# Altium PCB GAT562 Mesh Solar Relay V1.3.PcbDoc
Units mm, origin at the board's own origin, x right, y up, seen from the top; angles counter-clockwise.
Board outline 48.02 x 27 mm, 2 copper layers (Top Layer, Bottom Layer), stack 0.863 mm thick; 41 components, 26 nets, 133 pads, 47 vias.
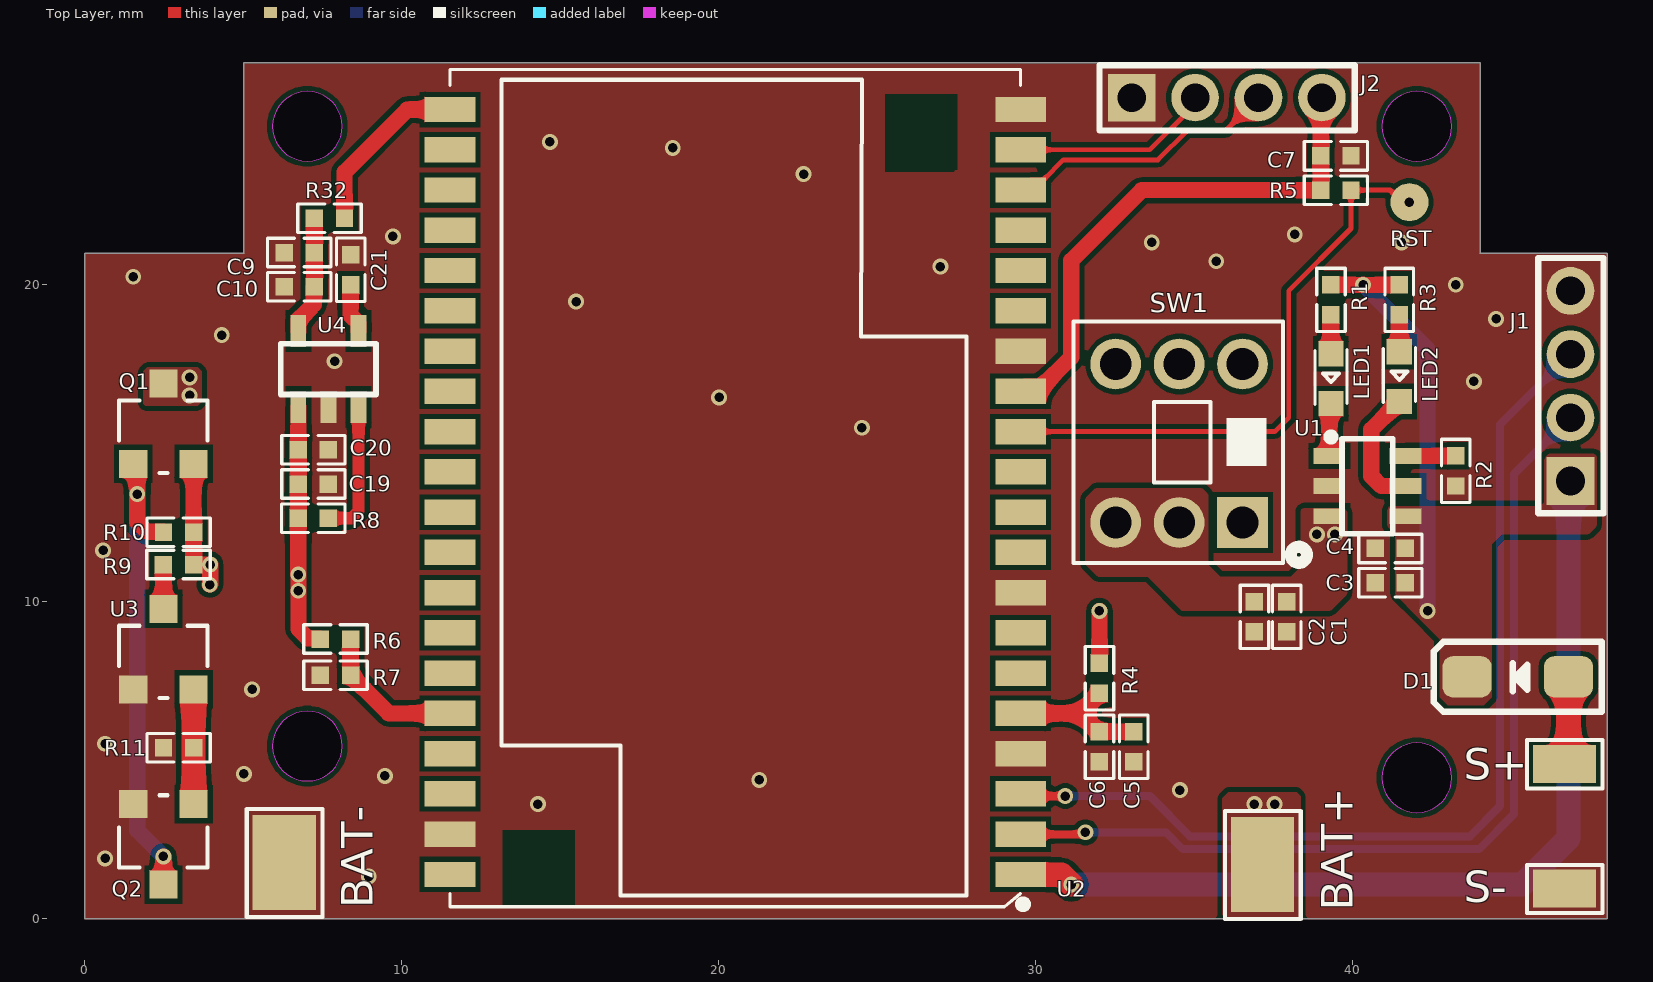
[diagram p0: Top Layer view]
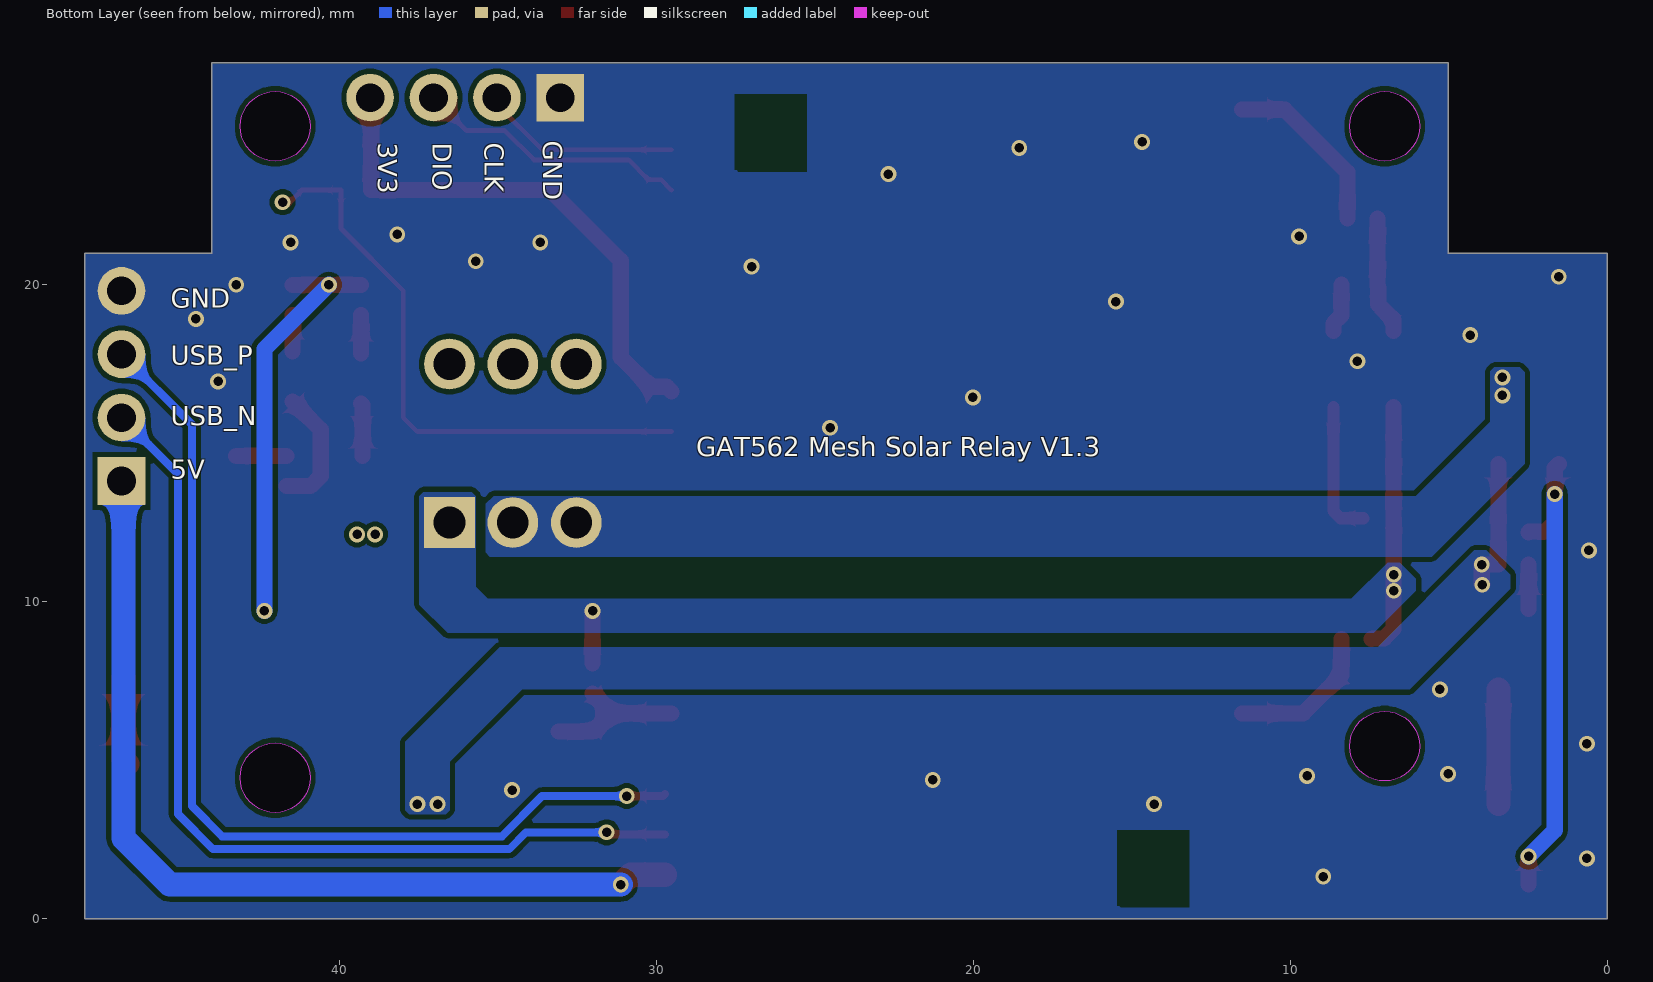
[diagram p1: Bottom Layer view, seen from below]
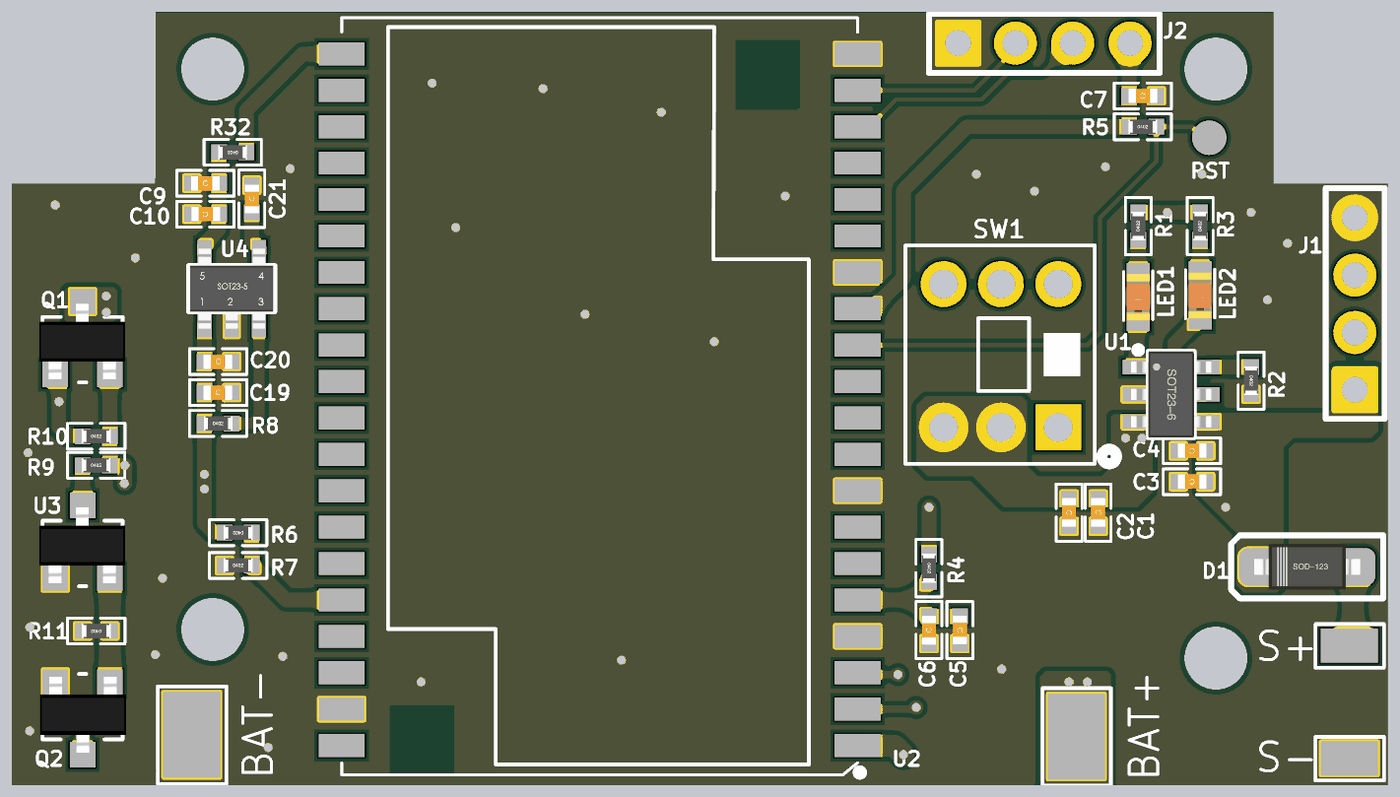
[diagram p2: 3D render of the assembled board from above, using the file's embedded part models]

## Layer stack, top to bottom
Top Solder: solder mask 0.0102, Solder Resist, Dk 3.5
Top Layer: signal copper 0.0175
Dielectric 3: prepreg 0.1679, PP-006, Dk 4.1
Dielectric 1: dielectric 0.4925, FR-4, Dk 4.8
Dielectric 2: prepreg 0.1679, PP-006, Dk 4.1
Bottom Layer: signal copper 0.0175
Bottom Solder: solder mask 0.0102, Solder Resist, Dk 3.5

## Board outline
0,0 0,21 5.016,21 5.016,27 44.017,27 44.017,21 48.017,21 48.017,0
cut-out: 40.916,4.45 ccw(c42.016,4.45) 42.016,3.35 ccw(c42.016,4.45) 43.116,4.45 ccw(c42.016,4.45) 42.016,5.55 ccw(c42.016,4.45)
cut-out: 5.917,5.45 ccw(c7.017,5.45) 7.017,4.35 ccw(c7.017,5.45) 8.117,5.45 ccw(c7.017,5.45) 7.017,6.55 ccw(c7.017,5.45)
cut-out: 40.916,25 ccw(c42.016,25) 42.016,23.9 ccw(c42.016,25) 43.116,25 ccw(c42.016,25) 42.016,26.1 ccw(c42.016,25)
cut-out: 5.917,25 ccw(c7.017,25) 7.017,23.9 ccw(c7.017,25) 8.117,25 ccw(c7.017,25) 7.017,26.1 ccw(c7.017,25)

## Design rules (kind name [scope] priority, off if disabled: settings)
Clearance [All] p1: gap=0.152 ignorepadtopadclearanceinfootprint=FALSE
ComponentClearance [All] p1: gap=0.051 collisioncheckmode=3 verticalgap=0.254 showdistances=FALSE
DiffPairsRouting JLC_4LOR6L_2313_DiffPair_100OM [InDifferentialPairClass('JLC_4LOR6L_2313_100OM')] p1 off: maxlimit=0.203 minlimit=0.203 mostfreqgap=0.203 toplayer_minwidth=0.381 toplayer_maxwidth=0.381 toplayer_prefwidth=0.381 bottomlayer_minwidth=0.381 bottomlayer_maxwidth=0.381 bottomlayer_prefwidth=0.381 maxuncoupledlength=12.7
DiffPairsRouting JLC_4LOR6L_2313_DiffPair_90OM [InDifferentialPairClass('JLC_4LOR6L_2313_90OM')] p2: maxlimit=0.203 minlimit=0.203 mostfreqgap=0.203 toplayer_minwidth=0.153 toplayer_maxwidth=0.153 toplayer_prefwidth=0.153 bottomlayer_minwidth=0.153 bottomlayer_maxwidth=0.153 bottomlayer_prefwidth=0.153 maxuncoupledlength=12.7
DiffPairsRouting [All] p3 off: maxlimit=0.254 minlimit=0.254 mostfreqgap=0.254 toplayer_minwidth=0.381 toplayer_maxwidth=0.381 toplayer_prefwidth=0.381 bottomlayer_minwidth=0.381 bottomlayer_maxwidth=0.381 bottomlayer_prefwidth=0.381 maxuncoupledlength=12.7
MatchedLengths ALL [All] p1: tolerance=0.127 checknetsindiffpair=TRUE checkdiffpairvsdiffpair=FALSE checkxsignals=FALSE checkothers=FALSE
PlaneClearance [All] p1: clearance=0.203
PlaneConnect [All] p1: planeconnectstyle=Direct reliefexpansion=0.508 reliefentries=4 reliefconductorwidth=0.254 reliefairgap=0.254
PolygonConnect PWR_20mil [InNetClass('PWR')] p1: connectstyle=Direct reliefconductorwidth=0.508 reliefentries=4 polygonreliefangle="90 Angle" airgapwidth=0.254
PolygonConnect DIP_RELIEF--10MIL [(InComponentClass('Top Side Components')) and  (OnLayer('Multi-Layer'))] p2: connectstyle=Direct reliefconductorwidth=0.254 reliefentries=4 polygonreliefangle="90 Angle" airgapwidth=0.254
PolygonConnect ALL_FULL [All] p3: connectstyle=Direct reliefconductorwidth=0.254 reliefentries=4 polygonreliefangle="90 Angle" airgapwidth=0.254
RoutingVias VIA12MIL [All] p1: holewidth=0.305 width=0.61 viastyle="Through Hole" minholewidth=0.2 minwidth=0.4 maxholewidth=0.305 maxwidth=0.61
RoutingVias VIA7.874 [All] p2 off: holewidth=0.2 width=0.4 viastyle="Through Hole" minholewidth=0.2 minwidth=0.4 maxholewidth=0.2 maxwidth=0.4
RoutingVias VIA8MIL [All] p3 off: holewidth=0.203 width=0.406 viastyle="Through Hole" minholewidth=0.203 minwidth=0.406 maxholewidth=0.203 maxwidth=0.406
RoutingVias VIA10MIL [All] p4 off: holewidth=0.254 width=0.508 viastyle="Through Hole" minholewidth=0.254 minwidth=0.508 maxholewidth=0.254 maxwidth=0.508
SilkToSilkClearance [All vs OnLayer('Keep-Out Layer')] p1: silktosilkclearance=2.032
SilkToSolderMaskClearance SilkscreenOverComponentPads [IsPad] p1: minsilkscreentomaskgap=0.003 clearancetoexposedcopper=TRUE
SolderMaskExpansion [All] p1: expansion=0.064 istentingtop=FALSE
UnRoutedNet [All] p1: checkbadconnections=TRUE
Width [All] p1: maxlimit=0.762 minlimit=0.152 preferedwidth=0.152
Width PWR--10mil [InNetClass('PWR')] p2 off: maxlimit=2.54 minlimit=0.152 preferedwidth=0.508
Width ANT-20mil [InNetClass('ANT')] p3 off: maxlimit=0.508 minlimit=0.508 preferedwidth=0.508
Width Width-6mil [All] p4 off: maxlimit=0.203 minlimit=0.102 preferedwidth=0.152
Width JLC_4LOR6L_2313_DiffPair_100OM_width [InDifferentialPairClass('JLC_4LOR6L_2313_100OM')] p5 off: maxlimit=0.122 minlimit=0.122 preferedwidth=0.122
Width JLC_4LOR6L_2313_DiffPair_90OM_width [InDifferentialPairClass('JLC_4LOR6L_2313_90OM')] p6 off: maxlimit=0.153 minlimit=0.153 preferedwidth=0.153
Width JLC_4LOR6L_2313_DiffPair_50OM_width [InNetClass('JLC_4LOR6L_2313_50OM')] p7 off: maxlimit=0.147 minlimit=0.147 preferedwidth=0.147
23 further rules are at their usual default settings.

## Components (designator, comment, footprint, x,y, rotation, side; value= is the part's Value field where it differs from the comment)
BAT+ "" PAD2*3 31.317,2.005 r180 top locked
BAT- "" PAD2*3 0.456,2.068 r180 top
C1 "0.1UF" C0402 37.91,9.525 r270 top
C2 "2.2uF" C0402 36.893,9.525 r270 top
C3 "4.7uF" C0402 41.181,10.604 r180 top
C4 "0.1UF" C0402 41.181,11.684 r180 top
C5 "4.7uF" C0402 33.084,5.43 r270 top
C6 "0.1uF/0402" C0402 32.004,5.43 r90 top
C7 "0.1uF/0402" C0402 39.464,24.066 r180 top
C9 "0.1UF" C0402 6.764,21.019 r0 top
C10 "2.2uF" C0402 6.764,19.939 r180 top
C19 "4.7uF" C0402 7.206,13.716 r0 top
C20 "0.1UF" C0402 7.206,14.796 r0 top
C21 "0.1UF" C0402 8.382,20.478 r90 top
D1 "SS24-SOD123" SOD-123-1 45.2,7.636 r0 top
J1 "H-D-1X02" HDR1X4-2.0 46.863,13.812 r90 top
J2 "H-D-1X02" HDR1X4-2.0 33.02,25.908 r0 top
LED1 "RED" LED0603_RED_3D 39.306,17.831 r270 top
LED2 "GREEN" LED0603_RED_3D 41.465,17.894 r270 top
Q1 "IRLML5203TR" SOT23 1.524,14.351 r0 top
Q2 "2N7002" SOT23 3.429,3.619 r180 top
R1 "10K" R0402 39.306,19.525 r90 top
R2 "480 Ohm" R0402 43.244,14.13 r270 top
R3 "10K" R0402 41.465,19.525 r90 top
R4 "0R" R0402 32.004,7.587 r270 top
R5 "10K" R0402 39.464,22.987 r0 top
R6 "1M/0402" R0402 7.905,8.826 r180 top
R7 "1.5M/0402" R0402 7.905,7.683 r0 top
R8 "10K" R0402 7.204,12.637 r0 top
R9 "0R/0402" R0402 2.952,11.176 r0 top
R10 "1M/0402" R0402 2.954,12.192 r0 top
R11 "1M/0402" R0402 2.954,5.397 r180 top
R32 "0R" R0402 7.714,22.098 r180 top
RST "" PAD_29MIL 42.073,28.436 r90 top
S+ "" PAD1*2 46.963,10.72 r90 top
S- "" PAD1*2 46.963,6.783 r90 top
SW1 "SW TH 7*7" "SW TH 7*7" 36.517,12.5 r270 top locked
U1 "XQH4057D" XQH4057D 40.456,13.65 r90 top
U2 "GAT562 Mesh Module" "GAT562 MODULE" 29.516,1.4 r180 top locked
U3 "MAX809T" SOT23 1.524,7.239 r0 top
U4 "MIC5219-3.3V" SOT23-5 6.731,16.142 r180 top

## Footprints (in the part's own frame and the unit in brackets; to place one, negate y for a bottom-side part, rotate by r counter-clockwise, add the part's x,y. Pads: shape width x height; smd on the part's side, far side on the other; paste and mask are expansions set on the pad)
C0402 [mm]
  rect 0.55x0.55 smd: 1(-0.475,0) 2(0.475,0)
  silkscreen extent -1,-0.45 1,0.45, body extent -0.51,-0.25 0.49,0.25, height 0.49
"GAT562 MODULE" [mm]
  rect 1.6x0.8 smd: 1(0,0) 2(0,-1.27) 3(0,-2.54) 4(0,-3.81) 5(0,-5.08) 6(0,-6.35) 7(0,-7.62) 8(0,-8.89) 9(0,-10.16) 10(0,-11.43) 11(0,-12.7) 12(0,-13.97) 13(0,-15.24) 14(0,-16.51) 15(0,-17.78) 16(0,-19.05) 17(0,-20.32) 18(0,-21.59) 19(0,-22.86) 20(0,-24.13) 21(18,-24.13) 22(18,-22.86) 23(18,-21.59) 24(18,-20.32) 25(18,-19.05) 26(18,-17.78) 27(18,-16.51) 28(18,-15.24) 29(18,-13.97) 30(18,-12.7) 31(18,-11.43) 32(18,-10.16) 33(18,-8.89) 34(18,-7.62) 35(18,-6.35) 36(18,-5.08) 37(18,-3.81) 38(18,-2.54) 39(18,-1.27) 40(18,0)
  Multi-Layer pour cut-out: 2.007,-22.225 2.007,-24.613 4.267,-24.613 4.267,-22.174 2.108,-22.174 2.057,-22.225
  Multi-Layer pour cut-out: 14.072,0.991 14.072,-1.397 16.332,-1.397 16.332,1.041 14.173,1.041 14.122,0.991
  silkscreen extent -0.18,-25.39 18,1.04
HDR1X4-2.0 [mm] "Connector; Header; 4 Position"
  rect 1.5x1.5 hole 0.9: 1(0,0)
  round 1.5 hole 0.9: 2(2,0) 3(4,0) 4(6,0)
  silkscreen extent -1.02,-1.04 7.04,1.02
LED0603_RED_3D [mm]
  rect 0.8x0.8 smd: 1(0,0) 2(1.575,0)
  silkscreen extent -0.13,-0.51 1.6,0.51, body extent -0.02,-0.4 1.6,0.4, height 1.1
PAD1*2 [mm]
  rect 1.2x2 smd: 1(-5.83,0.29)
  silkscreen extent -6.6,-0.91 -5.08,1.47
PAD2*3 [mm]
  rect 2x3 smd: 1(-5.83,0.29)
  silkscreen extent -7.04,-1.4 -4.65,2.01
PAD_29MIL [mm]
  round 1.2 smd: 1(-5.83,0.29)
R0402 [mm]
  rect 0.55x0.55 smd: 1(-0.475,0) 2(0.475,0)
  silkscreen extent -1,-0.45 1,0.45, body extent -0.5,-0.25 0.5,0.25, height 0.3
SOD-123-1 [mm]
  rrect50% 1.55x1.3 smd: 1(1.6,0) 2(-1.6,0)
  silkscreen extent -2.65,-1.1 2.65,1.1, body extent -1.85,-0.8 1.85,0.8, height 1.22
SOT23 [mil]
  rect 35x35 smd: 1(0,0) 2(75,0) 3(37.5,100)
  silkscreen extent -18,-11 93,79, body extent -22,-7 96,97, height 43
SOT23-5 [mm]
  rect 0.5x1 smd: 1(0,0) 2(-0.95,0) 3(-1.9,0) 4(-1.9,-2.4) 5(0,-2.4)
  silkscreen extent -2.45,-2 0.55,-0.4, body extent -2.4,-2.6 0.5,0.2, height 1.09
"SW TH 7*7" [mm]
  rect 1.6x1.6 hole 1: 1(0,0)
  round 1.6 hole 1: 2(0,-2) 3(0,-4) 4(-5,0) 5(-5,-2) 6(-5,-4)
  silkscreen extent -6.35,-5.33 1.27,2.03
XQH4057D [mm]
  rect 0.5x1 smd: 1(0.95,1.2) 2(0,1.2) 3(-0.95,1.2) 4(-0.95,-1.2) 5(0,-1.2) 6(0.95,-1.2)
  silkscreen extent -1.5,-0.8 1.66,1.26, body extent -1.5,-1.4 1.5,1.4, height 1.15

## Part data
BAT+ BAT- RST S+ S-: library part TEST-DOT
C1 C4 C5 C9 C10 C19 C20 C21: library part 0_1.1UF
C2 C3: library part 0.1UF
C6 C7: library part CAP, "Capacitor"
D1: library part "DIODE SCHOTTKY_0", "DIODE 1N5817,DIP, 20V, 1A", Package=SMA, Vendor="DIODES Incorporated.", Vendor PN=SBR3A40SA
J1 J2: library part CON6_1_Dup1
LED1 LED2: library part LED
Q1: library part PMOS-2, "P-Channel Power MOSFET", ComponentLink1Description="Manufacturer Link", ComponentLink1URL=http://www.irf.com/, DatasheetVersion=PD-9.390D, LatestRevisionDate=17-Jul-2002, LatestRevisionNote="Re-released for DXP Platform.", Note="Pin 4 not drawn and electrically connected to Pin 2.", PackageDescription="TO, Thru-Hole, Vertical, Heatsink Mounted; 3 In-Line Leads; Pitch 2.54 mm", PackageReference=TO-220AB, PackageVersion=Feb-1997, Published=8-Jun-2000, Publisher="Altium Limited"
Q2: library part MOSFET-N
R1 R2 R3 R5 R6 R7 R8 R9 R10 R11: library part R0402_1.06K_WALSIN, NO_STUFF=., VENDER\PN=WALSIN\WR04X8061FT
R4 R32: library part RES, "Resistor , 2K Ohm 0402  5%"
SW1: "SW TH 7*7 3P/6P"
U2: library part INTERFACE
U3: "MAX809T SOT23"
U4: library part "REG CAT7101_2"

## Via types
v1: diameter 0.5, hole 0.3, Top Layer to Bottom Layer, tented both sides, 47 vias

## Nets (pads, with @x,y where several pads share a name; then routed paths per layer and width w, separated by ;. In a path a pad name is that pad's centre, name@x,y a point inside that pad or via, vN(x,y) a via of type N, cw(c..) or ccw(c..) an arc to the next point about the centre after c; other vN are vias at no path point)
3V3_SX: C9.2 C10.1 R32.2 U4.5 | length 3.8
  Top Layer w0.508: U4.5 6.731,18.894 7.218,19.381 7.218,19.918 C10.1 C9.2 R32.2
5V+: D1.1 S+.1 | length 2.8
  Top Layer w0.762: S+.1 46.799,5.016 D1.1
ADC_VBAT: R6.1 R7.2 U2.36 | length 4.8
  Top Layer w0.508: R6.1 R7.2 9.583,6.48 U2.36
BAT+: BAT+.1 Q1.2 R9.2 R10.2 | length 4.3
  Top Layer w0.508: Q1.2 3.429,13.208 R10.2 3.429,11.178 R9.2 v1(3.952,11.176) 3.952,10.556 v1(3.937,10.541)
  other v1: 36.893,3.619 37.529,3.619
BAT_EN: Q2.1 R11.1 U3.2 | length 3.6
  Top Layer w0.762: Q2.1 R11.1 U3.2
BAT_NRF: C5.1 C6.2 R4.2 U2.5 | length 4.7
  Top Layer w0.508: U2.5 31.372,6.48 ; R4.2 31.372,6.48 ; C5.1 C6.2 31.983,5.927 31.926,5.927 31.372,6.48
GND: BAT-.1 C1.2 C2.2 C3.2 C4.2 C5.2 C6.1 C7.1 C9.1 C10.2 C19.2 C20.2 C21.2 J1.4 J2.1 Q2.2 R2.2 R7.1 R11.2 S-.1 U1.2 U2.4 U2.8 U2.14 U2.20 U2.39 U3.1 U4.2
  other v1: 8.954,1.333 0.635,1.905 14.287,3.619 34.544,4.064 21.273,4.381 9.461,4.508 5.016,4.572 0.635,5.524 5.271,7.239 0.572,11.62 24.511,15.494 20.002,16.447 43.815,16.954 7.874,17.59 4.318,18.415 44.514,18.923 15.494,19.473 43.243,20.002 1.524,20.256 26.987,20.574 35.687,20.743 33.655,21.336 41.529,21.336 9.716,21.526 38.163,21.59 22.669,23.495 18.542,24.32 14.668,24.511
NetC21_1: C21.1 U4.4 | length 1.6
  Top Layer w0.508: C21.1 8.382,19.033 8.631,18.784 U4.4
NetLED1_1: LED1.1 R1.1 | length 1.2
  Top Layer w0.508: LED1.1 R1.1
NetLED1_2: LED1.2 U1.1 | length 1.7
  Top Layer w0.508: U1.1 39.256,16.206 LED1.2
NetLED2_1: LED2.1 R3.1 | length 1.2
  Top Layer w0.508: LED2.1 R3.1
NetLED2_2: LED2.2 U1.5 | length 3.9
  Top Layer w0.508: LED2.2 40.576,15.43 40.576,13.97 40.897,13.65 U1.5
NetQ1_1: Q1.1 Q2.3 R10.1 | length 15.5
  Top Layer w0.508: Q1.1 1.651,14.224 1.651,12.511 1.949,12.213 2.458,12.213 R10.1 ; Q2.3 v1(2.476,1.968)
  Bottom Layer w0.508: v1(1.651,13.399) 1.651,2.794 v1(2.476,1.968)
NetR2_1: R2.1 U1.6 | length 1.6
  Top Layer w0.508: U1.6 41.898,14.6 41.903,14.605 R2.1
NetR8_2: R8.2 U4.3 | length 4.3
  Top Layer w0.381: R8.2 8.408,12.636 8.631,12.86 U4.3
NetR9_1: R9.1 U3.3 | length 1.4
  Top Layer w0.508: U3.3 R9.1
NetR32_1: R32.1 U2.21 | length 5.6
  Top Layer w0.508: R32.1 8.189,23.556 10.163,25.53 U2.21
NRF_RST: R5.2 RST.1 U2.12 | length 18.6
  Top Layer w0.152: U2.12 37.532,15.37 37.973,15.811 37.973,19.812 39.939,21.778 R5.2 41.17,22.987 41.551,22.606 v1(41.783,22.606)
SWDCLK: J2.2 U2.19 | length 6.3
  Top Layer w0.152: U2.19 33.591,24.26 35.02,25.689 J2.2
SWDIO: J2.3 U2.18 | length 8.7
  Top Layer w0.152: U2.18 29.84,23.314 30.24,23.314 30.24,23.319 30.861,23.939 33.846,23.939 34.773,24.867 35.979,24.867 J2.3
USB_N: J1.2 U2.2 | length 29.3
  Top Layer w0.254: U2.2@29.718,2.667 31.429,2.667 31.493,2.73 v1(31.559,2.73)
  Bottom Layer w0.254: v1(31.559,2.73) 34.1,2.73 34.633,2.197 43.98,2.197 45.085,3.302 45.085,14.034 J1.2
USB_P: J1.3 U2.3 | length 31
  Top Layer w0.254: U2.3@29.718,3.937 29.781,3.873 v1(30.924,3.873)
  Bottom Layer w0.254: v1(30.924,3.873) 30.926,3.872 33.593,3.872 34.861,2.603 43.688,2.603 44.64,3.556 44.64,15.589 J1.3
VBAT: C1.1 C2.1 Q1.3 SW1.2 SW1.3 U1.3
  other v1: 38.862,12.128 39.433,12.128 3.302,16.51 3.302,17.081
VBAT_S: C19.1 C20.1 R4.1 R6.2 R8.1 SW1.1 U4.1 | length 9.5
  Top Layer w0.508: v1@6.729,10.858 R8.1 6.731,12.639 C19.1 C20.1 U4.1 ; v1(6.731,10.858) 6.731,9.145 7.029,8.848 7.408,8.848 R6.2 ; R4.1 v1(32.004,9.716)
  other v1: 6.731,10.351
VBUS: C3.1 C4.1 D1.2 J1.1 R1.2 R3.2 U1.4 U2.1 | length 42.4
  Top Layer w0.508: R1.2 40.32,20 v1(40.322,20.002) 40.325,20 R3.2
  Top Layer w0.762: U2.1@29.718,1.397 29.722,1.393 30.801,1.393 v1(31.115,1.079)
  Bottom Layer w0.508: v1(40.322,20.002) 42.355,17.97 v1(42.355,9.716)
  Bottom Layer w0.762: v1(31.115,1.079) 45.339,1.079 46.799,2.54 46.799,13.748 J1.1
VDD_NRF: C7.2 J2.4 R5.1 U2.13 | length 16.8
  Top Layer w0.508: U2.13 29.663,16.786 30.185,16.786 31.115,17.716 31.115,20.764 33.337,22.987 R5.1 C7.2 38.989,25.876 J2.4
pads on no net: SW1.4 SW1.5 SW1.6 U2.6 U2.7 U2.9 U2.10 U2.11 U2.15 U2.16 U2.17 U2.22 U2.23 U2.24 U2.25 U2.26 U2.27 U2.28 U2.29 U2.30 U2.31 U2.32 U2.33 U2.34 U2.35 U2.37 U2.38 U2.40

## Polygon pours and split planes (outlines as drawn)
VBUS on Top Layer "NONET_L-01_P-001" (solid, remove dead copper, pour order 24): 41.148,13.018 45.91,13.018 46.038,13.144 46.038,14.541 46.164,14.668 47.625,14.668 47.688,14.605 47.688,12.383 47.434,12.128 44.704,12.128 44.386,11.811 44.386,6.985 44.133,6.731 42.989,6.731 42.735,6.985 42.735,8.826 41.338,10.223 41.338,12.128 41.084,12.383 41.084,12.954
VBAT on Top Layer "NONET_L-01_P-001" (solid, remove dead copper, pour order 19): 1.968,17.399 3.556,17.399 3.683,17.272 3.683,16.319 3.556,16.192 1.905,16.192 1.841,16.256 1.841,17.272
VBAT on Top Layer "NONET_L-01_P-001" (solid, remove dead copper, pour order 18): 35.242,13.589 35.433,13.399 35.433,11.176 35.814,10.795 38.036,10.795 38.354,11.112 38.354,12.89 38.417,12.954 39.814,12.954 39.878,12.89 39.814,12.827 39.814,10.233 39.297,9.716 36.322,9.716 34.608,9.716 33.528,10.795 31.941,10.795 31.559,11.176 31.559,13.271 31.877,13.589
BAT+ on Top Layer "NONET_L-01_P-001" (solid, remove dead copper, pour order 16): 38.227,4 38.354,3.873 38.354,0.127 38.227,0 36.005,0 35.877,0.127 35.877,3.81 36.068,4
GND on Top Layer "NONET_L-01_P-001" (solid, remove dead copper, pour order 14): 0,21 5.016,21 5.016,26.969 44.005,26.969 44.005,21 48.006,21 48.006,-0.018 0,-0.018
VBAT_S on Bottom Layer "NONET_L-01_P-001" (solid, remove dead copper, pour order 22): 6.921,11.239 8.064,10.096 35.306,10.096 35.687,10.477 35.687,13.335 35.814,13.462 37.338,13.462 37.465,13.335 37.465,9.906 36.576,9.017 7.366,9.017 6.032,10.351 6.032,10.731 6.54,11.239
GND on Bottom Layer "NONET_L-01_P-001" (solid, remove dead copper, pour order 15): 0,21 5.016,21 5.016,26.969 44.005,26.969 44.005,21 48.006,21 48.006,-0.018 0,-0.018
VBAT on Bottom Layer "NONET_L-01_P-001" (solid, remove dead copper, pour order 20): 3.556,17.399 3.683,17.272 3.683,15.685 6.032,13.335 35.126,13.335 35.369,13.091 35.369,11.557 35.242,11.43 5.524,11.43 2.603,14.351 2.603,17.24 2.762,17.399
BAT+ on Bottom Layer "NONET_L-01_P-001" (solid, remove dead copper, pour order 17): 4.191,11.62 7.239,8.572 29.679,8.572 34.925,8.572 37.909,5.588 37.91,3.429 37.782,3.302 36.639,3.302 36.512,3.429 36.512,4.953 34.227,7.239 6.223,7.239 3.048,10.414 3.048,10.858 3.81,11.62

## Other copper
Top Layer:
  pour cut-out: 2.052,11.765 2.069,11.747 2.865,11.747 2.901,11.711 2.794,11.604 2.794,11.557 2.095,11.557 2.049,11.603 2.052,11.606

## Silkscreen, mask and mechanical layers (free items; w line width, h text height)
Top Overlay:
Bottom Overlay:
  text "GND" at 33.555,24.538 h0.6 r90
  text "CLK" at 35.397,24.475 h0.6 r90
  text "DIO" at 37.048,24.475 h0.6 r90
  text "3V3" at 38.762,24.475 h0.6 r90
  text "GND" at 45.303,19.277 h0.6
  text "USB_P" at 45.303,17.472 h0.6
  text "USB_N" at 45.303,15.567 h0.6
  text "GAT562 Mesh Solar Relay V1.3" at 28.729,14.587 h0.6
  text "5V" at 45.303,13.879 h0.6
Mechanical 1:
  circle w0.127: c7.017,25 r1.1
  circle w0.127: c42.016,25 r1.1
  circle w0.127: c42.016,4.45 r1.1
  circle w0.127: c7.017,5.45 r1.1
  lines w0.1: 0,0 0,21 5.016,21 5.016,27 44.017,27 44.017,21 48.017,21 48.017,0 5.016,0 0,0
Mechanical 14:
  drawing of 2252 lines, arcs and shapes, not listed